# Altium PCB PCB1.PcbDoc (part 2 of 3)
Units mil, origin at the board's own origin, x right, y up, seen from the top; angles counter-clockwise.
Board outline 3937.01 x 3937.01 mil, 4 copper layers (L1, L2, L3, L4), stack 61.831 mil thick; 104 components, 183 nets, 709 pads, 345 vias.
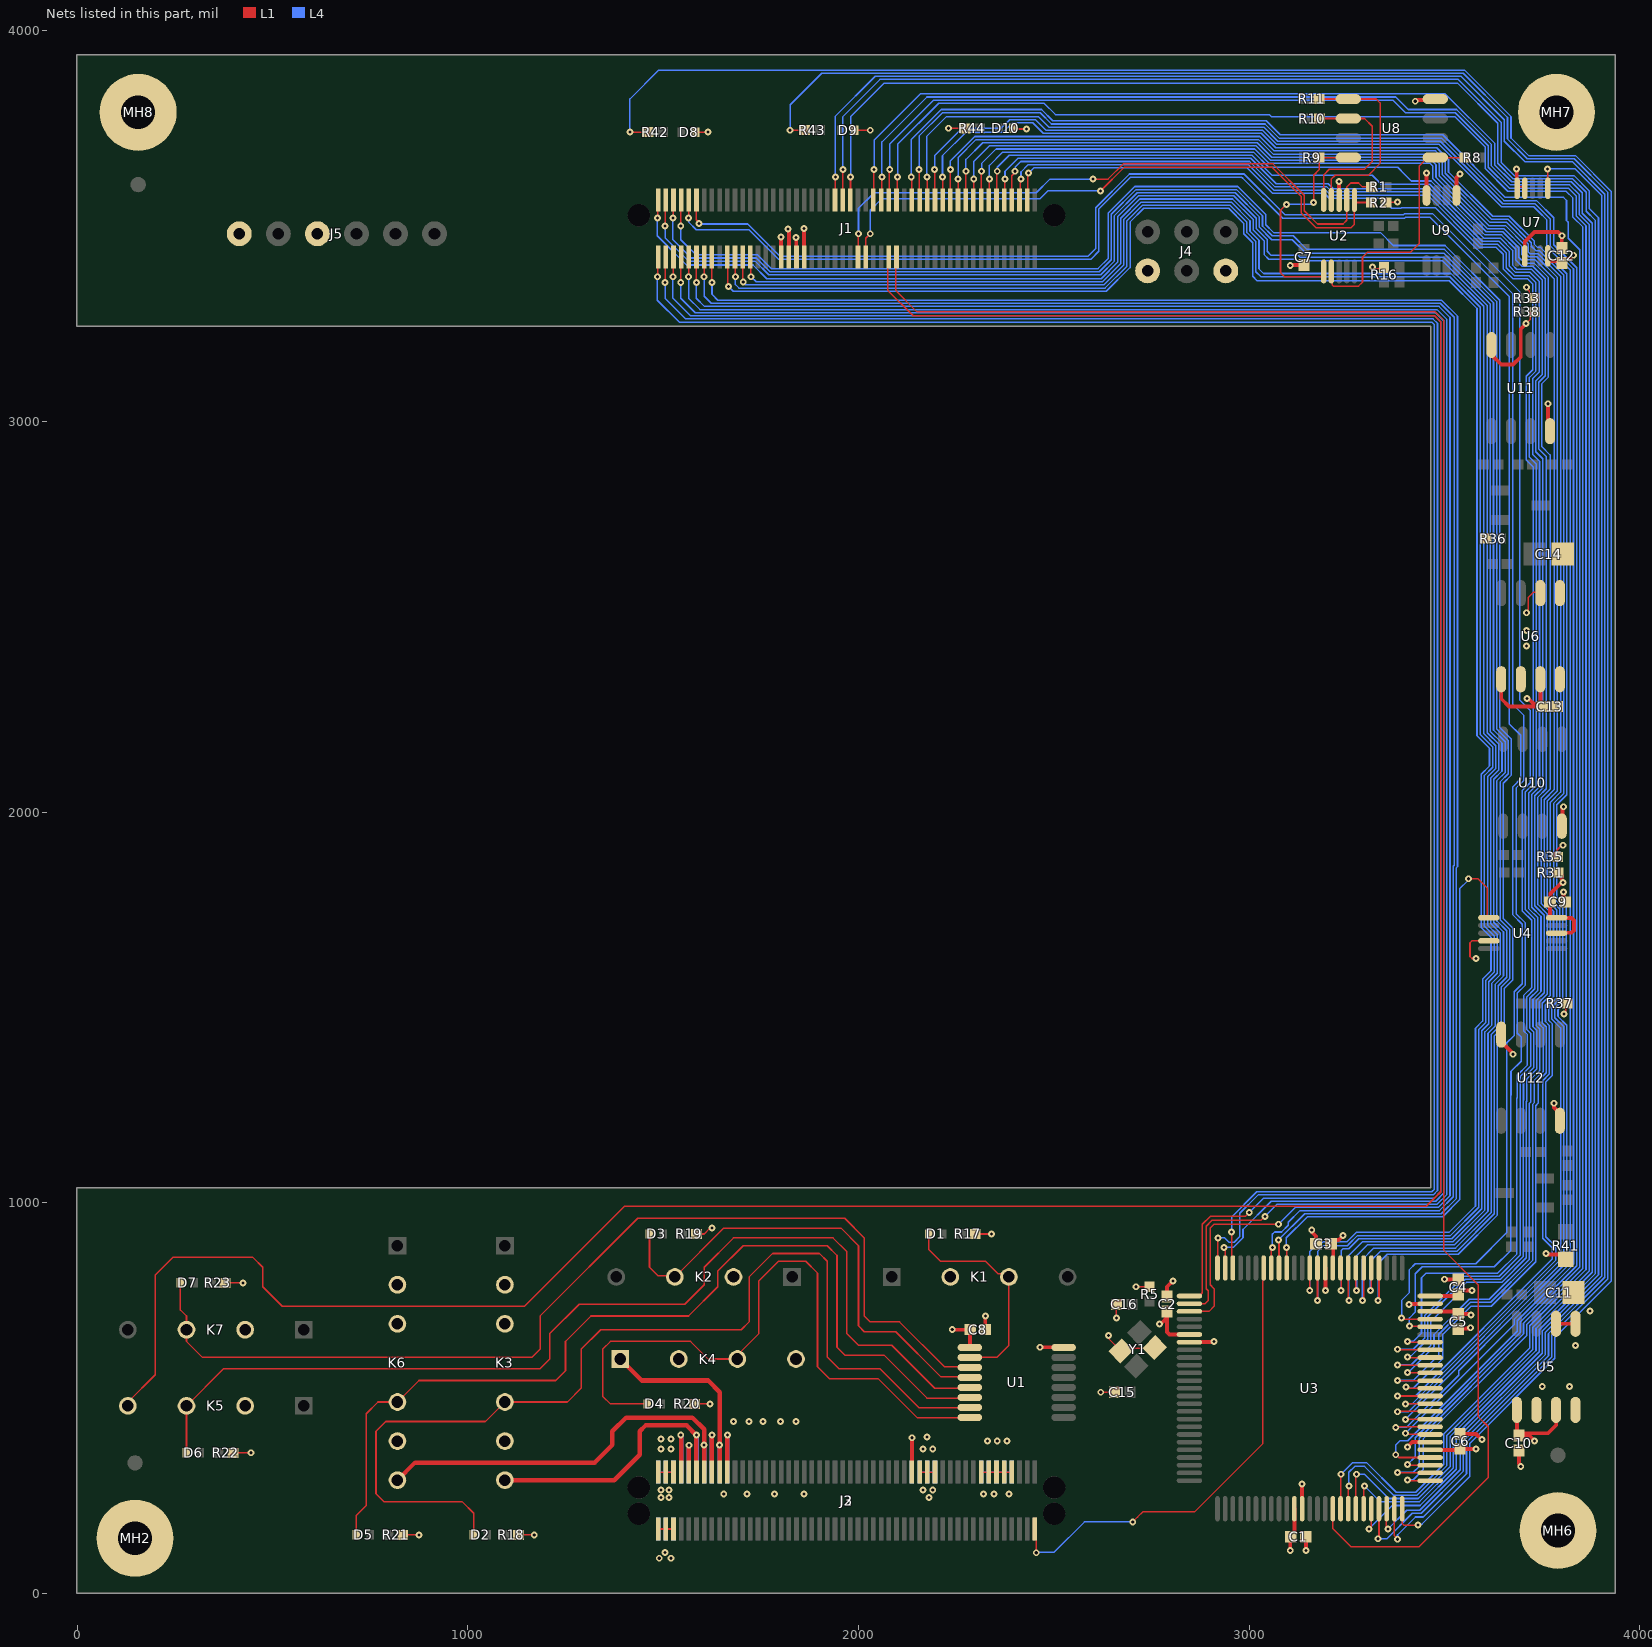
[diagram p4: the nets of this part, all layers, seen from the top]

## Via types
v1: diameter 17.72, hole 7.87, L1 to L4, 345 vias

## Nets (pads, with @x,y where several pads share a name; then routed paths per layer and width w, separated by ;. In a path a pad name is that pad's centre, name@x,y a point inside that pad or via, vN(x,y) a via of type N, cw(c..) or ccw(c..) an arc to the next point about the centre after c; other vN are vias at no path point) (continued)
+5V: C1.2 C2.2 C3.2 C4.2 C5.2 C6.2 C8.2 C9.2 C10.2 C12.2 C13.2 J2.1 J2.3 J2.5 J3.2 J3.4 J3.6 J4.2 J5.1 K1.2 K2.2 K3.2 K4.2 K5.2 K6.2 K7.2 R5.2 R17.1 R18.1 R19.1 R20.1 R21.1 R22.1 R23.1 R31.1 R33.1 R44.1 U1.9 U3.10 U3.31 U3.61 U3.80 U3.98 U3.100 U4.8 U4.10 U5.1 U5.3 U6.1 U6.3 U7.10 U9.8 U11.8 U12.8 | length 2366.3
  L1 w4: R23.1@378.7,795 v1(425,795) ; R22.1@398.7,360 v1(445,360) ; R21.1@833.7,150 v1(875,150) ; R18.1@1130,150 v1(1170,150) ; J2.1@1486.97,310.51 J2.3@1506.65,310.51 J2.5@1526.34,310.51 ; R20.1@1580,485 v1(1620,485) ; R19.1@1585,920 1605,920 1620,935 v1(1625,935) ; v1(2230,3750) R44.1@2272.6,3750 ; C8.2@2284.92,674.21 C8.2@2285.71,675 ; R17.1@2298.7,920 v1(2340,920) ; v1(2710,785) R5.2@2745,785 ; v1(2770,690) v1@2773.71,690 ; v1@2777.72,694.01 2779.01,694.01 ; 2790,701.29 2790,706.29 C2.2@2790,721.42 ; C1.2@3105,143.58 C1.2@3106.42,145 C1.2@3115.63,154.21 ; U3.10@3214.06,833.07 U3.10@3215,834.02 ; C3.2@3215,893.58 3211.83,896.75 3211.44,897.15 C3.2@3221.46,907.17 ; C5.2@3528.15,721.85 C5.2@3535,715 ; C4.2@3531.22,761.22 C4.2@3535,765 ; C6.2@3537.52,367.52 C6.2@3540,370 ; U12.8@3645,1410 U12.8@3645,1430.24 ; C10.2@3685,409.29 C10.2@3690,404.29 C10.2@3695.71,410 ; v1(3710,3343.14) 3710,3340.43 3716.92,3333.51 3716.92,3321.78 R33.1@3723.7,3315 ; v1(3710.86,2290.57) 3711.43,2290 v1@3715,2290 ; C13.2@3745,2275 C13.2@3750,2270 ; U11.8@3765,2979.76 U11.8@3770,2974.76 ; U4.10@3770,1734.8 3775.43,1729.37 U4.10@3790.55,1729.37 ; U5.3@3785,469.76 U5.3@3785.87,468.89 ; 3800,1828.71 3800,1821.86 v1@3801.86,1820
  L1 w10: v1(2240,675) C8.2@2285.71,675 ; U1.9@2284.92,629.57 C8.2@2284.92,674.21 ; v1@2773.71,690 2777.72,694.01 2790,706.29 ; 2790,701.29 2790,668.65 2795.86,662.8 U3.31@2846.93,662.8 ; v1(3105,110) C1.2@3105,143.58 ; C1.2@3115.63,154.21 U3.61@3115.63,216.93 ; C3.2@3209.29,895 3210.08,895 3211.83,896.75 3219.25,904.17 3229.17,904.17 3240,915 v1(3240,916.14) ; U3.10@3215,834.02 C3.2@3215,893.58 ; U9.8@3453.82,3582.01 3453.98,3582.17 3453.98,3634.84 v1(3454.14,3635) ; U3.80@3463.07,367.52 C6.2@3537.52,367.52 ; U3.98@3463.07,721.85 C5.2@3528.15,721.85 ; U3.100@3463.07,761.22 C4.2@3531.22,761.22 ; C5.2@3535,715 3566.14,715 v1(3568.1,713.04) ; C4.2@3535,765 3545,775 v1(3570,775) ; C6.2@3540,370 v1(3580,370) ; U12.8@3645,1410 3646.77,1410 3675,1381.77 v1(3675,1380) ; U6.1@3645,2339.76 3645,2290 3665,2270 C13.2@3750,2270 ; C10.2@3685,409.29 U5.1@3685,469.76 ; C10.2@3690,404.29 3715.71,404.29 v1(3730,390) ; C10.2@3695.71,410 3765,410 3785.87,430.87 U5.3@3785.87,468.89 ; v1@3715,2290 3730,2275 3745,2275 U6.3@3745,2339.76 ; C9.2@3764.37,1765.63 3770,1760 U4.10@3770,1734.8 ; U7.10@3764.37,3419.45 3764.37,3412.66 3767.03,3410 3795,3410 C12.2@3800,3405 3800,3405.79 3809.17,3414.96 3818.02,3414.96 3828.06,3425 v1(3830,3425) ; U11.8@3765,2979.76 v1(3765,3045) ; C9.2@3770,1770 3771.11,1771.11 3771.11,1791.11 3800,1820 3801.86,1820 v1(3802.86,1820) ; R31.1@3790,1845 3790.98,1845 3798.78,1837.2 3798.78,1829.93 3800,1828.71 ; U4.8@3790.55,1690 3791.65,1691.1 3824.96,1691.1 3831.05,1697.19 3831.05,1722.18 3824.96,1728.27 3791.65,1728.27 U4.10@3790.55,1729.37
  L4 w4: J3.2@1486.97,310.51 J3.4@1506.65,310.51 J3.6@1526.34,310.51
  other v1: 1495,245 1515,245 1495,265 1515,265 1495,370 1520,370 1495,395 1520,395
+5V_EN: J1.62 K5.4 | length 7636.1
  L1 w4: K5.4@130,480 130,490 200,560 200,815 245,860 450,860 475,835 475,785 525,735 1145,735 1400.86,990.86 3452.87,990.86 3490.35,1028.34 3490.35,3240 3490.35,3254.4 3474.75,3270 2140,3270 2075,3335 J1.62@2075,3420.75
A: J2.7 J3.8 | length 189.8
  L1 w11.55: v1(1545,405) 1545,400 1546.02,398.98 J2.7@1546.02,310.51
  L4 w11.55: v1(1545,405) 1545.89,404.11 1545.89,310.64 J3.8@1546.02,310.51
ADDR: J1.56 R2.1 U2.1 | length 1609.5
  L1 w4: J1.56@2018.46,3420.75 2018.46,3468.46 v1(2030,3480) ; v1(2619.78,3589.78) 2680.66,3650.66 3057.69,3650.66 3133,3575.35 3133,3533.31 3171.31,3495 3260,3495 3269.37,3504.37 U2.1@3269.37,3564.52 ; U2.1@3269.37,3566.54 U2.1@3269.37,3564.52 ; R2.1@3312.6,3560 3273.89,3560 U2.1@3269.37,3564.52
  L4 w4: v1(2030,3480) 2030,3540 2060,3570 2465,3570 2484.78,3589.78 v1(2619.78,3589.78)
AIN0: R11.2 U2.4 U8.1 | length 510.6
  L1 w4: R11.2@3178.7,3825 U8.1@3253.78,3825 3325,3825 3335,3815 3335,3660 3305,3630 3220,3630 3210,3620 3210,3566.85 U2.4@3210.32,3566.54
AIN1: R10.1 U2.5 U8.2 | length 436
  L1 w4: R10.1@3180,3775 U8.2@3253.78,3775 3295,3775 3315,3755 3315,3665 3295,3645 3205,3645 3190.63,3630.63 U2.5@3190.63,3566.54
AIN2: R9.1 U2.6 U8.4 | length 574.6
  L1 w4: v1(3095,3555) 3080,3540 3080,3380 3090,3370 3186.11,3370 3190.63,3374.52 U2.6@3190.63,3383.46 ; v1(3165,3560) 3165,3630 3178.7,3643.7 R9.1@3178.7,3675 U8.4@3253.78,3675
  L4 w4: v1(3095,3555) 3160,3555 v1(3165,3560)
AIN3: R8.1 U2.7 U8.5 | length 667
  L1 w4: U2.7@3210.32,3383.46 3212.19,3381.59 3212.19,3348.81 3215,3346 3280,3346 3290,3356 3290,3420 3303,3433 3413,3433 3435,3455 3435,3653.46 3456.54,3675 R8.1@3552.6,3675
ALARM: R42.1 U3.75 | length 6537.6
  L1 w4: v1(1415,3740) R42.1@1461.3,3740 ; U3.75@3391.22,216.93 3391.22,179.17 3395.4,175 v1(3431.87,175)
  L4 w4: v1(1415,3740) 1415,3825 1489,3899 3551,3899 3670,3780 3670,3725 3715,3680 3835,3680 3926.6,3588.4 3926.6,799.36 3782,654.76 3782,601.75 3564.14,383.89 3564.14,299.14 3442.44,177.44 3434.31,177.44 v1(3431.87,175)
ALERT: J1.54 R1.1 U2.2 | length 1668.7
  L1 w4: J1.54@1998.78,3420.75 1998.78,3478.78 v1(2000,3480) ; v1(2600,3620) 2638.69,3620 2677.34,3658.66 3061,3658.66 3141,3578.66 3141,3539 3175,3505 3240,3505 3249.69,3514.69 U2.2@3249.69,3566.54 3250.04,3566.89 3250.04,3600.04 3260,3610 3280,3610 3290,3600 R1.1@3312.6,3600
  L4 w4: v1(2000,3480) 2000,3545 2040,3585 2455,3585 2490,3620 v1(2600,3620)
B: J2.9 J3.10 | length 137.6
  L1 w11.55: J2.9@1565.71,310.51 v1(1565.66,379.29)
  L4 w11.55: J3.10@1565.71,310.51 v1(1565.66,379.29)
C: J2.11 J3.12 K3.4 | length 783
  L1 w11.55: K3.4@1095,290 1375,290 1440,355 1440,415 1455,430 1560,430 v1(1585,405) 1585,387.71 1585.29,387.42 1585.29,371.16 1585,370.87 1585,338.17 1585.26,337.91 1585.26,310.64 J2.11@1585.39,310.51
  L4 w11.55: v1(1585,405) 1585.34,404.66 1585.34,310.56 J3.12@1585.39,310.51
COIL1: D1.1 K1.3 U1.10 | length 561.4
  L1 w4: D1.1@2180,920 2180,880 2210,850 2325,850 2357.1,817.9 2377.1,817.9 K1.3@2385,810 2385,635 2355,605 U1.10@2285,605
COIL2: D3.1 K2.3 U1.12 | length 1249.6
  L1 w4: D3.1@1465,920 1465,835 1486.36,813.64 1526.36,813.64 K2.3@1530,810 1655,935 1955,935 2000,890 2000,685 2015,670 2095,670 2210,555 U1.12@2290,555
COIL3: D2.1 K3.3 U1.15 | length 2627.4
  L1 w4: D2.1@1014.57,150 1015,150.43 1015,205 985,235 785,235 765,255 765,415 790,440 1045,440 K3.3@1095,490 1255,490 1290,525 1290,625 1340,675 1700,675 1720,695 1720,810 1780,870 1900,870 1920,850 1920,605 1950,575 2055,575 2155,475 U1.15@2285,475
COIL4: D4.1 K4.3 U1.16 | length 1704.5
  L1 w4: D4.1@1459.57,485 1365,485 1345,505 1345,625 1365,645 1570,645 1615,600 K4.3@1690,600 1690,610 1745,665 1745,800 1795,850 1865,850 1895,820 1895,580 1925,550 2050,550 2150,450 U1.16@2285,450
COIL5: D6.1 K5.3 U1.13 | length 2650.2
  L1 w4: D6.1@279.57,360 280,360.43 K5.3@280,480 375,575 1185,575 1210,600 1210,665 1285,740 1555,740 1605,790 1605,835 1680,910 1935,910 1970,875 1970,665 2000,635 2085,635 2195,525 U1.13@2285,525
COIL6: D5.1 K6.3 U1.14 | length 2405.2
  L1 w4: D5.1@714.57,150 714.57,199.57 740,225 740,460 770,490 K6.3@820,490 875,545 1225,545 1250,570 1250,645 1315,710 1565,710 1640,785 1640,825 1705,890 1920,890 1945,865 1945,630 1965,610 2065,610 2175,500 U1.14@2280,500
COIL7: D7.1 K7.3 U1.11 | length 2634.4
  L1 w4: D7.1@264.57,795 264.57,725.43 280,710 K7.3@280,675 280,645 320,605 1165,605 1185,625 1185,710 1435,960 1965,960 2015,910 2015,710 2030,695 2105,695 2220,580 U1.11@2270,580
COM: J2.67 J3.68 | length 175.8
  L1 w10: J2.67@2136.57,310.51 v1(2136.57,398.43)
  L4 w10: J3.68@2136.57,310.51 v1(2136.57,398.43)
CS0: U3.73 U7.1 | length 3926.3
  L1 w4: U3.73@3351.85,216.93 3350.36,215.43 3350.36,169.64 v1(3355,165) ; v1(3763.64,3646.14) 3764,3645.77 3764,3600.92 U7.1@3764.37,3600.55
  L4 w4: v1(3355,165) 3403,213 3436.69,213 3540.14,316.46 3540.14,393.83 3758,611.69 3758,668.29 3902,812.29 3902,3578 3833.86,3646.14 v1(3763.64,3646.14)
CS1: J2.100 U3.19 | length 1208.1
  L1 w4: J2.100@2451.54,164.84 2455,161.38 v1(2455,104.14) ; v1(2701.87,183.13) 2714.09,195.35 2727.43,208.69 2860,208.69 3035,383.69 3035,800.25 3035.4,800.64 3035.4,831.58 U3.19@3036.89,833.07
  L4 w4: v1(2455,104.14) 2455.86,105 2500,105 2578.13,183.13 v1(2701.87,183.13)
CS2: U3.16 U4.1 | length 1526.3
  L1 w4: v1(3095,885) 3095.94,884.06 U3.16@3095.94,833.07 ; v1(3560.86,1829.14) 3585.86,1829.14 3609.45,1805.55 U4.1@3609.45,1729.37
  L4 w4: v1(3095,885) 3095,910.05 3148.95,964 3495.06,964 3539.14,1008.08 3539.14,1804.14 v1@3560,1825 ; v1@3560.86,1825.01 v1(3560.86,1829.14)
D: J2.13 J3.14 K6.4 | length 1063.2
  L1 w11.55: K6.4@820,290 865,335 1325,335 1370,380 1370,415 1405,450 1575,450 1605,420 v1(1605,380) 1605,310.59 J2.13@1605.08,310.51
  L4 w11.55: v1(1605,380) v1(1605,380) 1605.04,310.55 J3.14@1605.08,310.51
DATA: R43.1 U3.74 | length 6151.2
  L1 w4: v1(1825,3745) R43.1@1862.6,3745 ; U3.74@3371.54,216.93 3371.54,147.61 3379.57,139.57 v1(3379.57,138.64)
  L4 w4: v1(1825,3745) 1825,3810 1906,3891 3547.69,3891 3661,3777.69 3661,3722.69 3711.69,3672 3831.69,3672 3918,3585.69 3918,805.67 3774,661.67 3774,605.06 3556.14,387.2 3556.14,306.14 3445.66,195.66 3425.66,195.66 3379.57,149.57 v1(3379.57,138.64)
E: J2.15 J3.16 | length 189.2
  L1 w11.55: J2.15@1624.76,310.51 1624.76,404.76 v1(1625,405)
  L4 w11.55: J3.16@1624.76,310.51 1624.87,310.62 1624.87,404.87 v1(1625,405)
F: J2.17 J3.18 K4.1 | length 564.4
  L1 w11.55: K4.1@1390,600 1445,545 1615,545 1645,515 1645,380 1644.45,379.45 J2.17@1644.45,310.51
  L4 w11.55: J3.18@1644.47,310.54 v1(1644.5,380)
G: J2.19 J3.20 | length 189.7
  L1 w11.55: J2.19@1664.13,310.51 1664.13,404.13 v1(1665,405)
  L4 w11.55: J3.20@1664.13,310.51 1664.13,404.13 v1(1665,405)
GND: C1.1 C2.1 C3.1 C4.1 C5.1 C6.1 C7.1 C8.1 C9.1 C10.1 C11.1 C12.1 C13.1 C14.1 C15.1 C16.1 D8.1 D9.1 D10.1 J1.34 J1.36 J1.38 J1.40 J2.2 J2.4 J2.6 J2.69 J2.71 J2.73 J2.85 J2.87 J2.89 J2.91 J2.93 J3.1 J3.3 J3.5 J3.70 J3.72 J3.74 J3.86 J3.88 J3.90 J3.92 J3.94 J4.6 J5.3 K3.5 K3.6 K4.4 K6.5 K6.6 MH2.1 MH6.1 MH7.1 MH8.1 R2.2 R16.1 R35.1 R36.1 R37.1 R38.1 R41.1 U1.8 U2.3 U3.11 U3.32 U3.62 U3.81 U3.99 U4.4 U5.2 U5.4 U5.5 U5.6 U6.2 U6.4 U6.5 U6.6 U7.4 U7.5 U7.7 U8.8 U9.5 U10.4 U11.4 U12.4 Y1.2 Y1.4 | length 2864.8
  L1 w4: J2.2@1486.97,164.84 J2.4@1506.65,164.84 J2.6@1526.34,164.84 ; D8.1@1582.62,3740 v1(1615,3740) ; v1(1820,3491.77) v1@1821.61,3490.16 ; v1(1840,3470) v1@1840.65,3469.35 ; J1.38@1840.65,3422.7 1840,3422.05 J1.38@1841.3,3420.75 ; v1(1860,3493.03) v1@1860.98,3492.05 ; D9.1@1990,3745 v1(2030,3745) ; J2.69@2156.26,310.51 J2.71@2175.94,310.51 J2.73@2195.63,310.51 ; J2.85@2313.74,310.51 J2.87@2333.43,310.51 J2.89@2353.11,310.51 J2.91@2372.8,310.51 J2.93@2392.48,310.51 ; v1@2324.29,709.29 v1(2325,710) ; D10.1@2395,3750 2396.86,3748.14 v1(2430,3748.14) ; U1.8@2524.65,630 U1.8@2525.08,629.57 ; v1(2620,515) C15.1@2654.84,515 ; v1(2640,660) 2640,652.67 Y1.4@2671.85,620.82 2699.64,620.82 2706.6,627.78 2756.76,627.78 Y1.2@2758.15,629.18 ; C16.1@2659.84,740 2659.84,705.16 v1(2660,705) ; v1@2908.11,643.11 v1(2910,645) ; v1(3135,280) v1@3135.32,279.69 ; C1.1@3135.32,154.69 C1.1@3145,145 ; U3.11@3194.37,833.07 U3.11@3195,832.44 ; v1(3315,3395) 3320,3390 3330,3390 R16.1@3340,3400 ; R2.2@3350,3560 3350.86,3560.86 v1(3379.14,3560.86) ; v1(3580,1625) 3570,1625 3565,1630 3565,1665 3570.32,1670.31 U4.4@3609.45,1670.31 ; U11.4@3620,3170 U11.4@3620,3195.24 ; U7.5@3685.63,3600.55 U7.4@3705.32,3600.55 ; v1(3708.7,3250) 3719.06,3260.36 3719.06,3270.36 R38.1@3728.7,3280 ; v1(3710,2510) 3713.8,2513.8 3713.8,2548.16 3727.88,2562.24 3743,2562.24 U6.6@3745,2560.24 ; v1@3750,525 v1(3750,530) ; v1(3760,870) 3761.04,868.96 v1@3761.04,867.48 ; R35.1@3788.7,1885 3788.7,1903.7 3800,1915 v1(3802.86,1915) ; U12.4@3795,1209.76 U12.4@3795,1230.43 ; U10.4@3800,1963.78 U10.4@3802.21,1965.99 ; v1@3802.21,2011.22 v1(3804.42,2013.43) ; v1(3806.14,1483.36) 3808.48,1485.71 3810,1485.71 R37.1@3810,1505 ; C11.1@3830,770 C11.1@3855.03,744.97
  L1 w10: J1.34@1801.93,3420.75 v1(1801.93,3471.93) ; J1.36@1821.61,3420.75 v1@1821.61,3490.16 ; J1.38@1840.65,3422.7 v1@1840.65,3469.35 ; J1.40@1860.98,3420.75 v1@1860.98,3492.05 ; C8.1@2324.29,675 v1@2324.29,709.29 ; v1(2465,630) U1.8@2524.65,630 ; C2.1@2790,760 2790,785 v1(2805,800) ; U3.32@2846.93,643.11 v1@2908.11,643.11 ; v1(3104.96,3399.14) 3105.81,3400 C7.1@3140,3400 ; U3.62@3135.32,216.93 v1@3135.32,279.69 ; v1(3145,110) C1.1@3145,145 ; v1(3160,930) 3160,925 3170.71,914.29 C3.1@3170.71,895 ; v1(3195,775) U3.11@3195,832.44 ; U2.3@3230,3566.54 v1(3230,3614.14) ; v1(3405,375) 3417.2,387.2 U3.81@3463.07,387.2 ; v1(3409.14,740) 3410.33,741.19 3462.72,741.19 U3.99@3463.07,741.54 ; v1(3425,3819.14) 3427.09,3819.14 3429.96,3822.02 3473.24,3822.02 U8.8@3476.22,3825 ; v1(3500,804.14) 3500.86,804.14 3501.42,803.58 C4.1@3535,803.58 ; U9.5@3530.59,3582.01 3530.59,3623.65 3538.93,3632 v1(3538.93,3633.08) ; C5.1@3535,676.42 3537.11,678.52 3564.67,678.52 v1(3566.14,680) ; C6.1@3540,408.58 3579.95,408.58 3595.07,393.46 v1(3596.14,393.46) ; U11.4@3620,3170 3645,3145 3675,3145 3695,3165 3695,3236.3 v1(3708.7,3250) ; v1(3683.86,3646.14) 3684.74,3645.26 3684.74,3601.44 U7.5@3685.63,3600.55 ; C10.1@3690,365.71 3690,332.09 3695,327.09 v1(3695,325) ; U7.7@3705.32,3419.45 3705.32,3460.31 3730,3485 3790.28,3485 3800,3475.28 v1(3800,3475) 3800,3453.58 3805,3448.58 C12.1@3800,3443.58 ; v1@3761.04,867.48 3762.09,868.52 3763.56,868.52 3764.61,867.48 3797.52,867.48 R41.1@3810,855 ; v1(3780,1254.54) 3780,1244.09 3793.65,1230.43 U12.4@3795,1230.43 ; U5.6@3785,690.24 U5.5@3835,690.24 ; U10.4@3802.21,1965.99 v1@3802.21,2011.22 ; v1(3804.29,1795) 3804.29,1764.29 C9.1@3808.58,1760
  L4 w4: J3.1@1486.97,164.84 J3.3@1506.65,164.84 J3.5@1526.34,164.84 ; J3.70@2156.26,310.51 J3.72@2175.94,310.51 J3.74@2195.63,310.51 ; J3.86@2313.74,310.51 J3.88@2333.43,310.51 J3.90@2353.11,310.51 J3.92@2372.8,310.51 J3.94@2392.48,310.51
  other v1: 1490,90 1520,90 1505,105 2180,245 1655,255 1715,255 1785,255 1860,255 2320,255 2346.81,255 2385,255 2165,265 2190,265 2165,370 2190,370 2330,390 2355,390 2380,390 2175,400 1680,440 1720,440 1755,440 1800,440 1840,440 3820,530 3835,635 3872.17,722.5 3710,2425 3710,2465
GPIO1: J1.2 U3.23 | length 5019.5
  L1 w4: v1(1485,3370) 1485.98,3370.98 1485.98,3419.76 J1.2@1486.97,3420.75 ; v1(2955,925) 2955,836.22 U3.23@2958.15,833.07
  L4 w4: v1(1485,3370) 1485,3310 1541.78,3253.22 3468.12,3253.22 3473.91,3247.43 3473.91,1034.53 3467.38,1028 3019.26,1028 2955,963.74 v1(2955,925)
GPIO2: J1.4 U3.25 | length 5063.1
  L1 w4: v1(1505,3355) 1505.83,3355.83 1505.83,3419.92 J1.4@1506.65,3420.75 ; U3.25@2918.78,833.07 2920,834.29 v1(2920,910)
  L4 w4: v1(1505,3355) 1505,3315 1558,3262 3470.65,3262 3481.91,3250.74 3481.91,1031.21 3470.69,1020 3022.57,1020 2975.86,973.29 2975.86,913.43 2961.57,899.14 2948.07,899.14 2937.21,910 v1(2920,910)
GPIO3: J1.6 U3.26 | length 5178.7
  L1 w4: v1(1525,3370) 1525.67,3370.67 1525.67,3420.08 J1.6@1526.34,3420.75 ; U3.26@2846.93,761.22 2871.39,761.22 2880,769.83 2880,945 2900,965 2990,965 v1(3000,975)
  L4 w4: v1(1525,3370) 1525,3315 1570,3270 3473.97,3270 3489.91,3254.06 3489.91,1027.9 3474.01,1012 3037,1012 v1(3000,975)
GPIO4: J1.8 U3.24 | length 5001
  L1 w4: v1(1545,3355) 1545.51,3355.51 1545.51,3420.24 J1.8@1546.02,3420.75 ; v1(2935.86,885) 2938.46,882.39 U3.24@2938.46,833.07
  L4 w4: v1(1545,3355) 1545,3315 1582,3278 3477.28,3278 3497.91,3257.37 3497.91,1024.59 3477.32,1004 3056.57,1004 2984.14,931.57 2984.14,910.4 2959.88,886.14 2937,886.14 v1(2935.86,885)
GPIO5: J1.10 U3.27 | length 5207.1
  L1 w4: v1@1565,3375 v1(1565,3370) 1565.35,3370.35 1565.35,3420.39 J1.10@1565.71,3420.75 ; U3.27@2846.93,741.54 2886.54,741.54 2895,750 2895,775 2890,780 2890,940 2905,955 3030,955 v1(3040,965)
  L4 w4: v1(1565,3370) 1565,3315 1594,3286 3480.59,3286 3505.91,3260.69 3505.91,1021.27 3480.63,996 3071,996 v1(3040,965)
GPIO6: J1.12 U3.28 | length 5224
  L1 w4: v1(1585,3355) 1585.2,3355.2 1585.2,3420.55 J1.12@1585.39,3420.75 ; U3.28@2846.93,721.85 2896.85,721.85 2910,735 2910,780 2900,790 2900,935 2910,945 v1(3075,945)
  L4 w4: v1(1585,3355) 1585,3315 1606,3294 3485.75,3294 3513.91,3265.84 3513.91,1017.96 3483.95,988 3118,988 v1(3075,945)
GPIO7: J1.14 U3.18 | length 4890.5
  L1 w4: v1(1605,3370) v1(1605,3370) 1605.04,3420.71 J1.14@1605.08,3420.75 ; U3.18@3056.57,833.07 3056.57,881.57 v1(3060,885)
  L4 w4: v1(1605,3370) 1605,3319.98 1622.98,3302 3489.06,3302 3525,3266.06 3525,1863.77 3522.35,1861.11 3522.35,1015.08 3487.26,980 3130,980 3100,950 3100,942.34 3082.66,925 3065,925 3059.14,919.14 3059.14,885.86 v1(3060,885)
GPIO8: J1.16 U3.17 | length 4858.3
  L1 w4: J1.16@1624.76,3420.75 1624.88,3420.63 1624.88,3355.12 v1(1625,3355) ; v1(3075,905) 3076.26,903.74 U3.17@3076.26,833.07
  L4 w4: v1(1625,3355) 1625,3325 1640,3310 3492.37,3310 3533,3269.37 3533,1860.45 3530.35,1857.8 3530.35,1010.6 3491.75,972 3142,972 v1(3075,905)
GPIO9: J1.64 U3.66 | length 5071.1
  L1 w4: J1.64@2097.2,3420.75 2095,3418.54 2095,3335 2150,3280 3476.06,3280 3498.35,3257.71 3498.35,877.86 3585.86,790.34 3585.86,452.83 3612,426.69 3612,297 3435,120 3260,120 3214.06,165.94 U3.66@3214.06,216.93
GPIO10: J1.20 U3.13 | length 5302.6
  L1 w4: J1.20@1664.13,3420.75 1665.63,3419.25 1665.63,3346.5 v1(1667.13,3345) v1@1666.72,3345 ; v1(3155,775) U3.13@3155,833.07
  L4 w4: v1(1667.13,3345) 1679.13,3333 2634.31,3333 2695,3393.69 2695,3510 2730,3545 2947.37,3545 2986.03,3506.34 2986.03,3480 3009,3457.03 3009,3371 3020,3360 3511.86,3360 3583,3288.86 3583,2195.19 3615,2163.19 3615,2117.97 3594,2096.97 3594,1704.47 3618.86,1679.61 3618.86,1593.8 3597.14,1572.09 3597.14,1464.82 3579.14,1446.82 3579.14,991.51 3511.63,924 3274,924 3250,900 3188.69,900 3182.69,894 3174,894 3155,875 v1(3155,775)
GPIO11: J1.22 U3.12 | length 5325.6
  L1 w4: J1.22@1683.82,3420.75 1684.41,3420.16 1684.41,3370.59 v1(1685,3370) ; U3.12@3174.69,833.07 3174.69,750.31 v1(3175,750)
  L4 w4: v1(1685,3370) 1685,3350 1694,3341 2631,3341 2687,3397 2687,3513.31 2726.69,3553 2950.69,3553 2994.03,3509.66 2994.03,3483.31 3017,3460.34 3017,3383 3030,3370 3513.18,3370 3591,3292.18 3591,2198.51 3623,2166.51 3623,2114.65 3602,2093.65 3602,1707.78 3626.86,1682.93 3626.86,1590.49 3605.14,1568.77 3605.14,1461.51 3587.14,1443.51 3587.14,988.2 3514.94,916 3277.31,916 3255,893.69 3251.31,890 3190,890 3175,875 v1(3175,750)
GPIO12: J1.24 U3.9 | length 5212.1
  L1 w4: J1.24@1703.5,3420.75 1704.25,3420 1704.25,3357.61 v1(1705,3356.86) ; U3.9@3233.74,833.07 3235,831.81 v1(3235,775)
  L4 w4: v1(1705,3356.86) 1705,3355 1711,3349 2627.69,3349 2679,3400.31 2679,3516.63 2723.37,3561 2954,3561 3002.03,3512.97 3002.03,3486.63 3025,3463.66 3025,3390 3036.72,3378.28 3516.21,3378.28 3600,3294.49 3600,2200.82 3631,2169.82 3631,2111.34 3610,2090.34 3610,1711.1 3634.86,1686.24 3634.86,1587.18 3613.14,1565.46 3613.14,1458.2 3595.14,1440.2 3595.14,984.89 3518.25,908 3280.63,908 3254.63,882 3240,882 3235,877 v1(3235,775)
GPIO13: J1.26 U3.8 | length 5203.7
  L1 w4: J1.26@1723.19,3420.75 1724.09,3419.84 1724.09,3370.91 v1(1725,3370) ; U3.8@3253.43,833.07 3253.43,751.57 v1(3255,750)
  L4 w4: v1(1725,3370) 1738,3357 2624.37,3357 2671,3403.63 2671,3519.94 2720.06,3569 2957.31,3569 3010.03,3516.28 3010.03,3489.94 3038,3461.97 3038,3427 3050,3415 3117.66,3415 3121.8,3410.86 3494.95,3410.86 3609.14,3296.66 3609.14,2202.99 3639,2173.13 3639,2108.02 3618,2087.02 3618,1714.41 3642.86,1689.55 3642.86,1583.86 3621.14,1562.15 3621.14,1454.88 3603.14,1436.88 3603.14,981.57 3521.57,900 3290,900 3255,865 v1(3255,750)
GPIO14: J1.1 U3.7 | length 5475.2
  L1 w4: v1(1485,3520) 1485.98,3520.98 1485.98,3565.43 J1.1@1486.97,3566.42 ; U3.7@3273.11,833.07 3273.11,776.03 v1(3274.14,775)
  L4 w4: v1(1485,3520) 1485,3475 1560,3400 1730,3400 1765,3365 2621.06,3365 2663,3406.94 2663,3523.25 2716.75,3577 2960.63,3577 3018.03,3519.6 3018.03,3493.25 3046,3465.28 3046,3435 3056,3425 3125,3425 3130,3420 3497.12,3420 3617.14,3299.98 3617.14,2206.3 3647,2176.45 3647,2104.71 3626,2083.71 3626,1717.73 3650.86,1692.87 3650.86,1580.55 3629.14,1558.83 3629.14,1451.57 3611.14,1433.57 3611.14,978.26 3524.88,892 3302,892 3275,865 3275,775.86 v1(3274.14,775)
GPIO15: J1.3 U3.6 | length 5488
  L1 w4: v1(1505,3500) 1505.83,3500.83 1505.83,3565.59 J1.3@1506.65,3566.42 ; v1(3290,750) 3292.8,752.8 U3.6@3292.8,833.07
  L4 w4: v1(1505,3500) 1505,3470 1565,3410 1735,3410 1770,3375 1905,3375 2619.75,3375 2655,3410.25 2655,3526.57 2713.43,3585 2963.94,3585 3026.03,3522.91 3026.03,3496.57 3057.6,3465 3110,3465 3145,3430 3498.43,3430 3625.14,3303.29 3625.14,2209.62 3655,2179.76 3655,2101.4 3634,2080.4 3634,1721.04 3658.86,1696.18 3658.86,1577.24 3637.14,1555.52 3637.14,1448.25 3619.14,1430.25 3619.14,974.95 3528.2,884 3319,884 3290,855 v1(3290,750)
GPIO16: J1.5 U3.5 | length 5417.7
  L1 w4: v1(1525,3520) 1525.67,3520.67 1525.67,3565.75 J1.5@1526.34,3566.42 ; v1(3310,775) 3310.14,775 3312.48,777.34 U3.5@3312.48,833.07
  L4 w4: v1(1525,3520) 1525,3465 1572,3418 1738.31,3418 1773.31,3383 1895,3383 2616.43,3383 2647,3413.57 2647,3529.88 2710.12,3593 2967.25,3593 3034.03,3526.23 3034.03,3499.88 3058.91,3475 3112.88,3475 3147.88,3440 3499.75,3440 3633.14,3306.6 3633.14,2212.93 3663,2183.07 3663,2098.08 3642,2077.08 3642,1724.35 3666.86,1699.5 3666.86,1573.92 3645.14,1552.21 3645.14,1444.94 3627.14,1426.94 3627.14,971.63 3531.51,876 3336,876 3310,850 v1(3310,775)
GPIO17: J1.7 U3.4 | length 5444.4
  L1 w4: v1(1545,3500) 1545.51,3500.51 1545.51,3565.91 J1.7@1546.02,3566.42 ; v1(3330,750) 3330,755 3332.17,757.17 U3.4@3332.17,833.07
  L4 w4: v1(1545,3500) 1545,3465 1584,3426 1741.63,3426 1776.63,3391 1890,3391 2601.8,3391 2613.12,3391 2639,3416.88 2639,3533.2 2706.8,3601 2970.57,3601 3042.03,3529.54 3042.03,3503.2 3062.23,3483 3335.69,3483 3368.69,3450 3501.06,3450 3641.14,3309.92 3641.14,2216.25 3671,2186.39 3671,2094.77 3650,2073.77 3650,1727.67 3674.86,1702.81 3674.86,1570.61 3653.14,1548.89 3653.14,1441.63 3635.14,1423.63 3635.14,968.32 3534.82,868 3353,868 3330,845 v1(3330,750)
GPIO18: J1.9 U3.97 | length 5413.4
  L1 w4: v1(1565,3520) 1565.35,3520.35 1565.35,3566.06 J1.9@1565.71,3566.42 ; v1(3390,705) 3392.83,702.17 U3.97@3463.07,702.17
  L4 w4: v1(1565,3520) 1565,3510 1585,3490 1720,3490 1795,3415 1885,3415 2595,3415 2615,3435 2615,3543.14 2696.86,3625 2980.51,3625 2982.85,3622.66 3085.51,3520 3397.2,3520 3399.99,3522.79 3462.21,3522.79 3665.14,3319.86 3665.14,2226.19 3695,2196.33 3695,2084.83 3675,2064.83 3675,1736.61 3698.86,1712.75 3698.86,1560.67 3678.28,1540.09 3678.28,1428.28 3659.14,1409.14 3659.14,923.57 3579.57,844 3425,844 3410,829 3410,770 3390,750 v1(3390,705)
GPIO19: J1.11 U3.96 | length 5421.9
  L1 w4: J1.11@1585.39,3566.42 1585,3566.02 1585,3516.14 1591.21,3509.93 v1(1591.21,3506.21) ; v1(3410,685) 3411.26,683.74 3461.81,683.74 U3.96@3463.07,682.48
  L4 w4: v1(1591.21,3506.21) 1592.43,3505 1716.31,3505 1798.31,3423 1895,3423 2588,3423 2607,3442 2607,3546.45 2693.55,3633 2987.5,3633 ; 2987.5,3632.5 3091,3529 3394.89,3529 3396.68,3530.79 3470.27,3530.79 3675,3326.06 3675,2275 3703,2247 3703,2081.51 3683,2061.51 3683,1739.92 3706.86,1716.06 3706.86,1557.35 3686.28,1536.78 3686.28,1433.72 3696,1424 3696,1362.31 3670,1336.31 3670,1275.56 3669.14,1274.71 3669.14,877.83 3627.31,836 3442.72,836 3425,818.28 3425,720 3410,705 v1(3410,685)
GPIO20: J1.47 U3.72 | length 6170
  L1 w4: J1.47@1939.72,3566.42 1940.29,3566.98 1940.29,3624.43 v1(1940.86,3625) ; v1(3330,140) 3332.17,142.17 U3.72@3332.17,216.93
  L4 w4: v1(1940.86,3625) 1940,3625.86 1940,3780 2043,3883 3542,3883 3653,3772 3653,3717 3706,3664 3827.31,3664 3910,3581.31 3910,808.98 3766,664.98 3766,608.37 3548.14,390.51 3548.14,313.14 3440,205 3417.43,205 3352.43,140 v1(3330,140)
GPIO21: J1.49 U3.71 | length 6118.3
  L1 w4: J1.49@1959.41,3566.42 1959.7,3566.71 1959.7,3644.7 v1(1960,3645) ; v1(3306.14,165) 3310.14,165 3312.48,167.34 U3.71@3312.48,216.93
  L4 w4: v1(1960,3645) 1960,3780 2055,3875 3535,3875 3645,3765 3645,3662.57 3678.57,3629 3831,3629 3870.28,3589.72 3870.28,3544.72 3894,3521 3894,815.61 3750,671.61 3750,615 3530,395 3530,317.63 3437.37,225 3366.14,225 v1(3306.14,165)
GPIO22: J1.51 U3.70 | length 6071.6
  L1 w4: J1.51@1979.09,3566.42 1979.55,3566.87 1979.55,3624.55 v1(1980,3625) ; U3.70@3292.8,216.93 3292.8,272.8 v1(3295,275)
  L4 w4: v1(1980,3625) 1980,3780 2065.71,3865.71 3532.98,3865.71 3636,3762.69 3636,3660.26 3675.26,3621 3827.69,3621 3862.28,3586.4 3862.28,3537.72 3886,3514 3886,818.92 3742,674.92 3742,618.31 3522,398.31 3522,320.94 3436.06,235 3335,235 v1(3295,275)
GPIO23: J1.57 U3.69 | length 5962
  L1 w4: J1.57@2038.15,3566.42 2039.07,3567.34 2039.07,3644.07 v1(2040,3645) ; U3.69@3273.11,216.93 3273.11,298.11 3275,300 v1(3275,305)
  L4 w4: v1(2040,3645) 2040,3720 2158,3838 3502,3838 3628,3712 3628,3656.95 3671.95,3613 3824.37,3613 3852.5,3584.87 3852.5,3532.5 3878,3507 3878,822.24 3734,678.24 3734,621.63 3514,401.63 3514,324.25 3432.75,243 3357,243 3325,275 3295,305 v1(3275,305)
GPIO24: J1.59 U3.68 | length 5944.8
  L1 w4: J1.59@2057.83,3566.42 2058.92,3567.5 2058.92,3623.92 v1(2060,3625) ; U3.68@3253.43,216.93 3253.43,273.43 v1(3255,275)
  L4 w4: v1(2060,3625) 2060,3715 2175,3830 3375,3830 3407,3798 3530.69,3798 3620,3708.69 3620,3653.63 3668.63,3605 3820,3605 3844.5,3580.5 3844.5,3529.19 3870,3503.69 3870,3434.66 3870,825.55 3726,681.55 3726,624.94 3506,404.94 3506,327.57 3429.43,251 3369,251 3340,280 3295,325 3270,325 3255,310 v1(3255,275)
GPIO25: J1.61 U3.67 | length 5914.1
  L1 w4: J1.61@2077.52,3566.42 2078.76,3567.66 2078.76,3643.76 v1(2080,3645) ; U3.67@3233.74,216.93 3233.74,303.74 v1(3235,305)
  L4 w4: v1(2080,3645) 2080,3710 2192,3822 3368,3822 3400,3790 3527.37,3790 3612,3705.37 3612,3650.32 3665.32,3597 3816.69,3597 3836.5,3577.19 3836.5,3525.87 3862,3500.37 3862,3431.35 3862,828.86 3718,684.86 3718,628.25 3498,408.25 3498,330.88 3426.12,259 3376,259 3300,335 3265,335 v1(3235,305)
GPIO26: J1.63 U3.76 | length 5593
  L1 w4: J1.63@2097.2,3566.42 2098.6,3567.81 2098.6,3623.6 v1(2100,3625) ; v1(3405,290) 3406.22,288.78 U3.76@3463.07,288.78
  L4 w4: v1(2100,3625) 2100,3708.94 2205.06,3814 2474.94,3814 2503.94,3785 3051.31,3785 3056.31,3780 3526.06,3780 3604,3702.06 3604,3647 3662,3589 3811,3589 3828.5,3571.5 3828.5,3522.56 3854,3497.06 3854,3428.03 3854,832.18 3710,688.18 3710,660 3445,395 3445,316.31 3419.86,291.17 3406.17,291.17 v1(3405,290)
GPIO27: J1.67 U3.77 | length 5530.3
  L1 w4: v1(2135,3625) 2135.79,3624.21 2135.79,3567.2 J1.67@2136.57,3566.42 ; v1(3380,310) 3381.54,308.46 U3.77@3463.07,308.46
  L4 w4: v1(2135,3625) 2135,3721.31 2211.69,3798 2468.31,3798 2497.31,3769 3043.83,3769 3079.55,3733.28 3495.09,3733.28 3655.38,3573 3804.37,3573 3812,3565.37 3812,3513.87 3816.25,3509.62 3816.25,3468.75 3846,3439 3846,835.49 3702,691.49 3702,664.37 3435,397.37 3435,325 3420,310 v1(3380,310)
GPIO28: J1.69 U3.78 | length 5378
  L1 w4: v1(2155,3645) 2155.63,3644.37 2155.63,3567.05 J1.69@2156.26,3566.42 ; v1(3405,330) 3406.85,328.15 U3.78@3463.07,328.15
  L4 w4: v1(2155,3645) 2155,3730 2215,3790 2465,3790 2494,3761 3040.52,3761 3076.52,3725 3492.06,3725 3652.06,3565 3735,3565 3779.14,3520.86 3779.14,3452.17 3838,3393.31 3838,838.8 3694,694.8 3694,667.69 3425,398.69 3425,350 v1(3405,330)
GPIO29: J1.71 U3.79 | length 5367.7
  L1 w4: v1(2175,3625) 2175.47,3624.53 2175.47,3566.89 J1.71@2175.94,3566.42 ; v1(3375,355) 3382.17,347.83 U3.79@3463.07,347.83
  L4 w4: v1(2175,3625) 2175,3730 2225,3780 2460,3780 2487,3753 3037.21,3753 3073.21,3717 3488.75,3717 3648.75,3557 3731.69,3557 3770,3518.69 3770,3450 3830,3390 3830,842.12 3686,698.12 3686,671 3405.86,390.86 3385.86,390.86 3375,380 v1(3375,355)
GPIO30: J1.73 U3.82 | length 5194.6
  L1 w4: v1(2195,3645) 2195.32,3644.69 2195.32,3566.73 J1.73@2195.63,3566.42 ; v1(3400,410) 3403.11,406.89 U3.82@3463.07,406.89
  L4 w4: v1(2195,3645) 2195,3680 2265,3750 2365,3750 2387,3772 2453,3772 2480,3745 3033.89,3745 3069.89,3709 3485.44,3709 3645.44,3549 3728.37,3549 3741.19,3536.19 3762,3515.37 3762,3446.69 3822,3386.69 3822,845.43 3678,701.43 3678,688 v1(3400,410)
GPIO31: J1.75 U3.83 | length 5207
  L1 w4: v1(2215,3625) 2215.16,3624.84 2215.16,3566.57 J1.75@2215.32,3566.42 ; v1(3375,425) 3380,425 3381.57,426.57 U3.83@3463.07,426.57
  L4 w4: v1(2215,3625) 2215,3680 2275,3740 2370,3740 2394,3764 2446,3764 2473,3737 3030.58,3737 3067.58,3700 3480,3700 3510,3670 3510,3638.14 3623.14,3525 3665.56,3525 3730,3460.56 3730,3452.77 3737.77,3445 3745.56,3445 3812.86,3377.71 3812.86,2044.3 3787,2018.44 3787,1783 3810.86,1759.14 3810.86,1514.28 3790.28,1493.7 3790.28,1476.8 3813,1454.08 3813,847.75 3670,704.75 3670,704.22 3536,570.22 3536,558.57 3403.29,425.86 3375.86,425.86 v1(3375,425)
GPIO32: J1.77 U3.84 | length 5065.8
  L1 w4: J1.77@2235,3566.42 v1(2235,3645) ; v1(3400,445) 3401.26,446.26 U3.84@3463.07,446.26
  L4 w4: v1(2235,3645) 2235,3666.31 2297.69,3729 3027.26,3729 3064.26,3692 3476.69,3692 3502,3666.69 3502,3634.82 3619.82,3517 3662.25,3517 3722,3457.25 3722,3448.3 3733.3,3437 3742.25,3437 3804.86,3374.39 3804.86,2047.61 3779,2021.75 3779,1779.69 3802.86,1755.83 3802.86,1517.59 3782.28,1497.01 3782.28,1473.48 3805,1450.77 3805,851.06 3642.01,688.07 3642.01,687.54 3400,445.53 v1(3400,445)
GPIO33: J1.79 U3.85 | length 5062.1
  L1 w4: J1.79@2254.69,3566.42 2254.84,3566.57 2254.84,3619.84 v1(2255,3620) ; v1(3380,465) 3380.94,465.94 U3.85@3463.07,465.94
  L4 w4: v1(2255,3620) 2255,3675 2301,3721 3023.95,3721 3060.95,3684 3473.37,3684 3494,3663.37 3494,3631.51 3616.51,3509 3658.94,3509 3714,3453.94 3714,3433.63 3718.63,3429 3738.94,3429 3796.86,3371.08 3796.86,2050.92 3771,2025.06 3771,1776.37 3794.86,1752.51 3794.86,1520.9 3774.28,1500.33 3774.28,1470.17 3797,1447.45 3797,854.37 3407.63,465 v1(3380,465)
GPIO34: J1.81 U3.86 | length 4975
  L1 w4: J1.81@2274.37,3566.42 2274.68,3566.73 2274.68,3639.69 v1(2275,3640) ; v1(3400,485) 3400.63,485.63 U3.86@3463.07,485.63
  L4 w4: v1(2275,3640) 2275,3670 2318,3713 3020.64,3713 3057.64,3676 3470.06,3676 3486,3660.06 3486,3628.2 3613.2,3501 3655.62,3501 3706,3450.62 3706,3430.31 3715.31,3421 3735.62,3421 3788.86,3367.76 3788.86,2054.24 3763,2028.38 3763,1773.06 3786.86,1749.2 3786.86,1524.22 3766.28,1503.64 3766.28,1466.85 3776,1457.14 3776,1326 3759.14,1309.14 3759.14,912.86 3785,887 3785,853.69 3416.31,485 v1(3400,485)
GPIO35: J1.83 U3.87 | length 4956.4
  L1 w4: J1.83@2294.06,3566.42 2294.53,3566.89 2294.53,3619.53 v1(2295,3620) ; v1(3380,505) 3380.32,505.31 U3.87@3463.07,505.31
  L4 w4: v1(2295,3620) 2295,3665 2335,3705 3017.32,3705 3054.32,3668 3466.75,3668 3478,3656.75 3478,3624.88 3609.88,3493 3652.31,3493 3698,3447.31 3698,3427 3712,3413 3732.31,3413 3780.86,3364.45 3780.86,2057.55 3755,2031.69 3755,1769.75 3778.86,1745.89 3778.86,1527.53 3758.28,1506.95 3758.28,1463.54 3768,1453.82 3768,1329.31 3751.14,1312.46 3751.14,909.29 3775.86,884.57 3775.86,855.86 3425,505 v1(3380,505)
GPIO36: J1.85 U3.88 | length 4874.5
  L1 w4: J1.85@2313.74,3566.42 2314.37,3567.05 2314.37,3639.37 v1(2315,3640) ; v1(3401.29,528.71) 3405,525 U3.88@3463.07,525
  L4 w4: v1(2315,3640) 2315,3660 2352,3697 3014.01,3697 3051.01,3660 3463.43,3660 3470,3653.43 3470,3621.57 3606.57,3485 3649,3485 3690,3444 3690,3420 3705,3405 3729,3405 3765.86,3368.14 3765.86,3113.23 3749.14,3096.51 3749.14,2934.61 3770,2913.75 3770,2060 3770,2058.01 3747,2035.01 3747,1766.43 3770.86,1742.57 3770.86,1530.84 3750.28,1510.27 3750.28,1460.23 3760,1450.51 3760,1332.63 3740,1312.63 3740,1255.05 3733.14,1248.2 3733.14,848.95 3619.2,735 3567.63,735 3495,662.37 3495,600 3420,525 3405,525 v1(3401.29,528.71)
GPIO37: J1.87 U3.89 | length 4833.3
  L1 w4: J1.87@2333.43,3566.42 2334.21,3567.2 2334.21,3619.21 v1(2335,3620) ; v1(3380,545) 3380.31,544.69 U3.89@3463.07,544.69
  L4 w4: v1(2335,3620) 2335,3655 2369,3689 3010.7,3689 3049.7,3650 3380,3650 3400,3630 3415,3615 3465.25,3615 3603.25,3477 3645.68,3477 3682,3440.68 3682,3413 3698,3397 3725.68,3397 3757.86,3364.82 3757.86,3116.54 3741.14,3099.83 3741.14,2928.86 3760,2910 3760,2075 3760,2059.32 3739,2038.32 3739,1763.12 3762.86,1739.26 3762.86,1534.16 3742.28,1513.58 3742.28,1456.91 3752,1447.2 3752,1335.94 3730,1313.94 3730,1256.37 3725.14,1251.51 3725.14,852.26 3617.88,745 3566.31,745 3485,663.69 3485,610 3420,545 v1(3380,545)
GPIO38: J1.89 U3.90 | length 4717.6
  L1 w4: J1.89@2353.11,3566.42 2354.06,3567.36 2354.06,3639.06 v1(2355,3640) ; v1(3405,565) 3462.44,565 U3.90@3463.07,564.37
  L4 w4: v1(2355,3640) 2355,3650 2386,3681 3007.38,3681 3058.38,3630 3315,3630 3338,3607 3461.94,3607 3599.94,3469 3642.37,3469 3674,3437.37 3674,3399.94 3684.94,3389 3722.37,3389 3749.86,3361.51 3749.86,3119.86 3733.14,3103.14 3733.14,2921.86 3751,2904 3751,2061.63 3731,2041.63 3731,1759.8 3754.86,1735.95 3754.86,1537.47 3734.28,1516.9 3734.28,1453.6 3744,1443.88 3744,1339.25 3720,1315.25 3720,1257.68 3717.14,1254.82 3717.14,855.57 3614.57,753 3563,753 3473,663 3473,631.69 3406.31,565 v1(3405,565)
GPIO39: J1.91 U3.91 | length 4729.8
  L1 w4: J1.91@2372.8,3566.42 2373.9,3567.52 2373.9,3618.9 v1(2375,3620) ; v1(3380,585) 3380.94,584.06 U3.91@3463.07,584.06
  L4 w4: v1(2375,3620) 2375,3640 2408,3673 3004.07,3673 3069.21,3607.86 3202.14,3607.86 3215,3595 3462.63,3595 3596.63,3461 3639.05,3461 3666,3434.05 3666,3396.63 3681.63,3381 3719.05,3381 3741.86,3358.2 3741.86,3125.54 3725.14,3108.83 3725.14,2915.86 3743,2898 3743,2064.95 3723,2044.95 3723,1756.49 3746.86,1732.63 3746.86,1540.78 3726.28,1520.21 3726.28,1450.29 3736,1440.57 3736,1342.57 3710,1316.57 3710,1259 3709.14,1258.14 3709.14,858.89 3646.25,796 3556.04,796 3536.82,776.78 3536.82,768.17 3465,696.35 3465,635 3415,585 v1(3380,585)
GPIO40: J1.93 U3.92 | length 4621
  L1 w4: J1.93@2392.48,3566.42 2392.48,3628.77 2400,3636.29 v1(2400,3640) ; v1(3405,605) 3406.26,603.74 U3.92@3463.07,603.74
  L4 w4: v1(2400,3640) 2401.51,3641.51 2401.51,3651.51 2415,3665 3000.75,3665 3065.9,3599.86 3198.83,3599.86 3211.69,3587 3459.31,3587 3593.31,3453 3635.74,3453 3658,3430.74 3658,3393.31 3678.31,3373 3715.74,3373 3718.08,3370.66 3733.86,3354.88 3733.86,3128.86 3717.14,3112.14 3717.14,2907.86 3735,2890 3735,2068.26 3715,2048.26 3715,1753.18 3738.86,1729.32 3738.86,1544.1 3718.28,1523.52 3718.28,1446.97 3728,1437.26 3728,1345.88 3702,1319.88 3702,1262.31 3701.14,1261.45 3701.14,862.2 3642.94,804 3552.72,804 3457,708.28 3457,650.69 3413.94,607.62 3407.62,607.62 v1(3405,605)
GPIO41: J1.95 U3.93 | length 4612
  L1 w4: J1.95@2412.17,3566.42 2414.01,3568.26 2414.01,3618.15 v1(2415.86,3620) ; v1(3380,625) 3385,625 3386.57,623.43 U3.93@3463.07,623.43
  L4 w4: v1(2415.86,3620) 2415.86,3638.29 2434.57,3657 2997.44,3657 3062.58,3591.86 3195.51,3591.86 3208.37,3579 3456,3579 3590,3445 3632.43,3445 3650,3427.43 3650,3390 3675,3365 3712.43,3365 3725.86,3351.57 3725.86,3132.17 3709.14,3115.46 3709.14,2900.86 3727,2883 3727,2071.57 3707,2051.57 3707,1749.86 3730.86,1726 3730.86,1547.41 3710.28,1526.84 3710.28,1443.66 3720,1433.94 3720,1349.2 3694,1323.2 3694,1265.62 3693.14,1264.76 3693.14,865.51 3639.63,812 3549.41,812 3449,711.59 3449,654 3420,625 v1(3380,625)
GPIO42: J1.97 U3.94 | length 4496.2
  L1 w4: J1.97@2431.85,3566.42 2433.43,3567.99 2433.43,3633.43 v1(2435,3635) ; v1(3405,645) 3406.89,643.11 U3.94@3463.07,643.11
  L4 w4: v1(2435,3635) 2449,3649 2994.13,3649 3059.27,3583.86 3192.2,3583.86 3205.06,3571 3339,3571 3365,3545 3388.26,3545 3390.05,3546.79 3476.89,3546.79 3692.84,3330.84 3692.84,2286.16 3719,2260 3719,2074.89 3699,2054.89 3699,1746.55 3722.86,1722.69 3722.86,1550.73 3702.28,1530.15 3702.28,1440.34 3712,1430.63 3712,1352.51 3686,1326.51 3686,1268.94 3685.14,1268.08 3685.14,868.83 3636.31,820 3453.31,820 3441,807.69 3441,666 3420,645 v1(3405,645)